# Altium PCB LY-LYJ-001V1.2.PcbDoc (part 1 of 2)
Units mm, origin at the board's own origin, x right, y up, seen from the top; angles counter-clockwise.
Board outline 190 x 47.13 mm, 2 copper layers (Top Layer, Bottom Layer); 162 components, 177 nets, 655 pads, 417 vias.
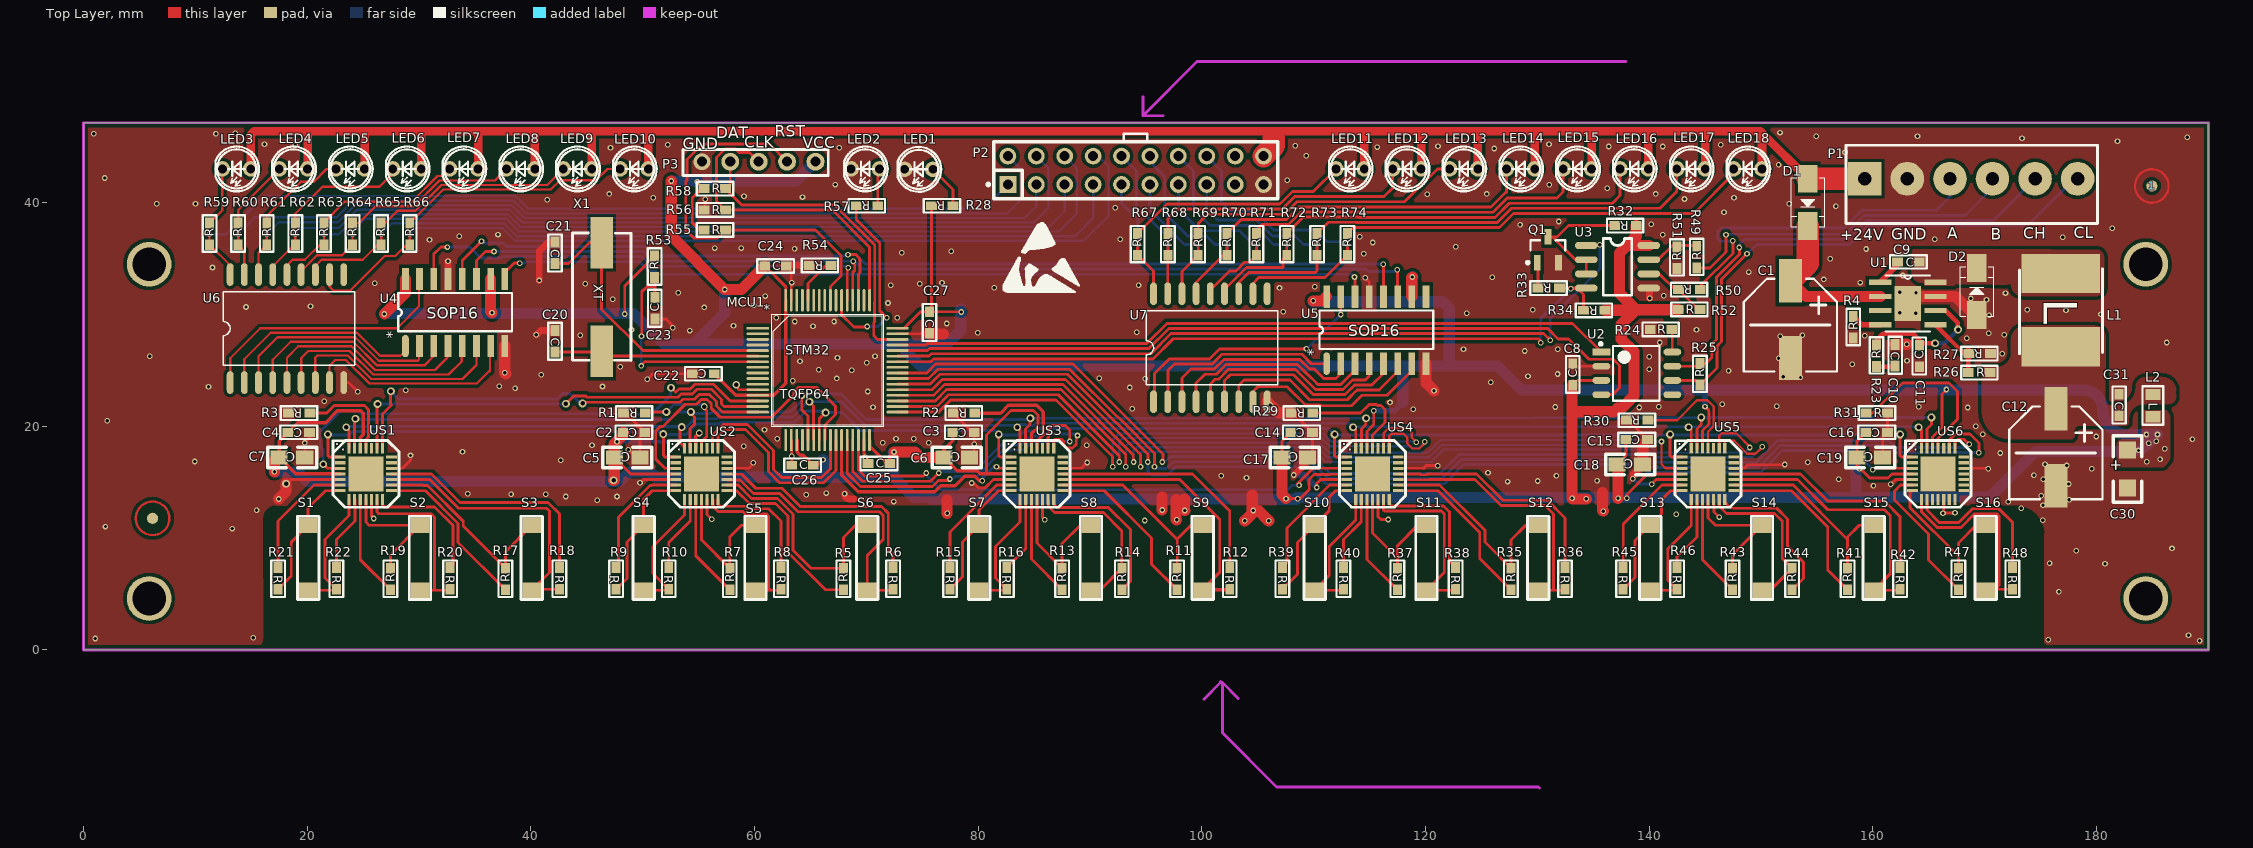
[diagram p0: Top Layer view]
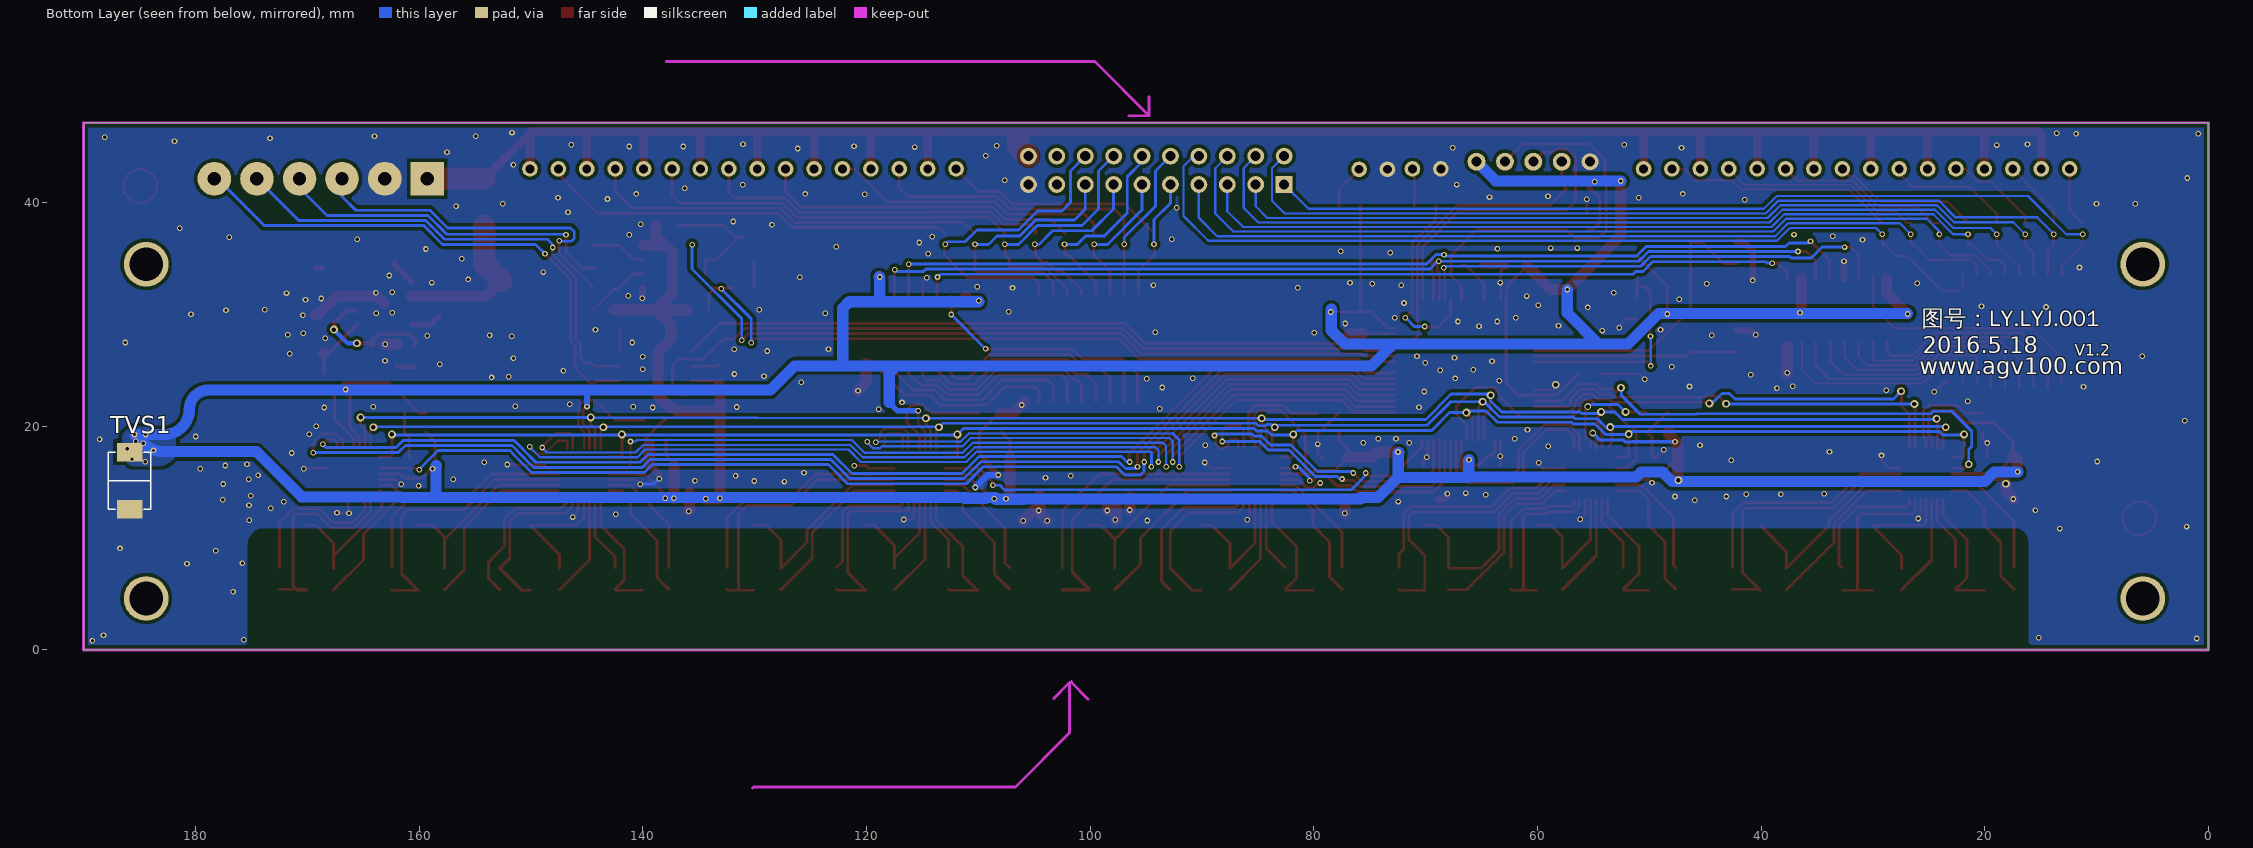
[diagram p1: Bottom Layer view, seen from below]

## Layer stack, top to bottom
Top Layer: signal copper 0.0356
Dielectric: dielectric 0.32, FR-4, Dk 4.8
Bottom Layer: signal copper 0.0356

## Board outline
0,47.129 0,0 190,0 190,47.129 0,47.129

## Design rules (kind name [scope] priority, off if disabled: settings)
Clearance Clearance_1 [inpoly] p1: gap=0.3
Clearance [All] p2: gap=0.203
PlaneClearance [All] p1: clearance=0.203
PlaneConnect [All] p1: planeconnectstyle=Direct reliefexpansion=0.508 reliefentries=4 reliefconductorwidth=0.5 reliefairgap=0.254
PolygonConnect VCC3_3 [InNet('VCC3.3V')] p1: connectstyle=Direct reliefconductorwidth=0.254 reliefentries=4 polygonreliefangle="90 Angle"
PolygonConnect NETC12_1 [InNet('NetC12_1')] p2: connectstyle=Direct reliefconductorwidth=0.254 reliefentries=4 polygonreliefangle="90 Angle"
PolygonConnect NETC9_1 [InNet('NetC9_1')] p3: connectstyle=Direct reliefconductorwidth=0.254 reliefentries=4 polygonreliefangle="90 Angle"
PolygonConnect [All] p4: connectstyle=Direct reliefconductorwidth=0.5 reliefentries=4 polygonreliefangle="90 Angle"
RoutingVias [All] p1: holewidth=0.4 width=0.7 viastyle="Through Hole" minholewidth=0.4 minwidth=0.6 maxholewidth=5 maxwidth=6
SilkscreenOverComponentPads [All] p1: minsilkscreentomaskgap=0.254
SolderMaskExpansion [All] p1: expansion=0.102
Width [All] p1: maxlimit=2.54 minlimit=0.203 preferedwidth=0.254
25 further rules are at their usual default settings.

## Components (designator, comment, footprint, x,y, rotation, side; value= is the part's Value field where it differs from the comment)
1 "Comment" Mark 184.937,41.478 r0 top
C1 "220uF" CAP_SMT_1 152.527,32.853 r180 top
C2 "104" C0603 50.127,19.391 r180 top
C3 "104" C0603 79.599,19.391 r180 top
C4 "104" C0603 20.163,19.391 r180 top
C5 "106" C0805 49.692,17.232 r180 top
C6 "106" C0805 79.163,17.232 r180 top
C7 "106" C0805 19.727,17.232 r180 top
C8 "104" C0603 133.096,23.709 r90 top
C9 "104" C0603 164.084,34.631 r180 top
C10 "4700pF" C0603 162.052,27.265 r270 top
C11 "47pF" C0603 164.084,25.36 r90 top
C12 "220uF" CAP_SMT_1 176.276,21.423 r180 top
C14 "104" C0603 109.825,19.391 r180 top
C15 "104" C0603 139.797,18.756 r180 top
C16 "104" C0603 161.26,19.391 r180 top
C17 "106" C0805 109.389,17.232 r180 top
C18 "106" C0805 139.361,16.597 r180 top
C19 "106" C0805 160.824,17.232 r180 top
C20 "12P" C0603 42.215,28.51 r270 top
C21 "12P" C0603 42.215,36.409 r270 top
C22 "104" C0603 56.337,24.624 r180 top
C23 "104" C0603 51.02,29.627 r90 top
C24 "104" C0603 60.96,34.377 r0 top
C25 "104" C0603 70.206,16.724 r0 top
C26 "104" C0603 63.373,16.572 r0 top
C27 "104" C0603 75.692,30.186 r270 top
C30 "10uF" C1206 182.753,17.882 r270 top
C31 "0.1uF" C0603 182.067,22.809 r270 top
D1 "D_SS14" D_3.0*5.0 154.178,42.124 r270 top
D2 "D_SS14" D_3.0*5.0 169.291,29.932 r90 top
L1 "5.5UH" L7*7 176.784,33.869 r270 top
L2 "L0805" L0805 185.166,21.819 r270 top
LED1 "" LED1-AK 74.625,42.977 r0 top
LED2 "" LED1-AK 69.85,43.013 r0 top
LED3 "" LED1-AK 13.631,43.013 r0 top
LED4 "" LED1-AK 18.711,43.013 r0 top
LED5 "" LED1-AK 23.791,43.013 r0 top
LED6 "" LED1-AK 28.871,43.013 r0 top
LED7 "" LED1-AK 33.951,43.013 r0 top
LED8 "" LED1-AK 39.031,43.013 r0 top
LED9 "" LED1-AK 44.111,43.013 r0 top
LED10 "" LED1-AK 49.191,43.013 r0 top
LED11 "" LED1-AK 113.199,43.013 r0 top
LED12 "" LED1-AK 118.279,43.013 r0 top
LED13 "" LED1-AK 123.359,43.013 r0 top
LED14 "" LED1-AK 128.439,43.013 r0 top
LED15 "" LED1-AK 133.519,43.013 r0 top
LED16 "" LED1-AK 138.599,43.013 r0 top
LED17 "" LED1-AK 143.679,43.013 r0 top
LED18 "" LED1-AK 148.759,43.013 r0 top
MCU1 "STM32F103R" TQFP64_STM32 60.325,28.789 r0 top
P1 "PIN6_6" KF350W_6 159.258,42.124 r0 top
P2 "Header 10X2" PIN20_10*2_2.54MM_1 82.677,41.489 r0 top
P3 "PIN5" PIN5_5*1_2.54MM_2 65.447,43.648 r180 top
Q1 "S8050" SOT-23 130.937,35.774 r90 top
R1 "33K" R0603 49.306,21.169 r180 top
R2 "33K" R0603 78.782,21.169 r180 top
R3 "33K" R0603 19.342,21.169 r180 top
R4 "243k" R0603 158.242,28.789 r90 top
R5 "100" R0603 67.945,6.283 r90 top
R6 "100" R0603 72.39,6.437 r270 top
R7 "100" R0603 57.785,6.283 r90 top
R8 "100" R0603 62.357,6.437 r270 top
R9 "100" R0603 47.625,6.437 r270 top
R10 "100" R0603 52.324,6.437 r270 top
R11 "100" R0603 97.79,6.283 r90 top
R12 "100" R0603 102.489,6.437 r270 top
R13 "100" R0603 87.503,6.283 r90 top
R14 "100" R0603 92.837,6.283 r90 top
R15 "100" R0603 77.47,6.437 r270 top
R16 "100" R0603 82.55,6.437 r270 top
R17 "100" R0603 37.719,6.283 r90 top
R18 "100" R0603 42.545,6.437 r270 top
R19 "100" R0603 27.432,6.283 r90 top
R20 "100" R0603 32.766,6.437 r270 top
R21 "100" R0603 17.399,6.437 r270 top
R22 "100" R0603 22.606,6.437 r270 top
R23 "16.9k" R0603 160.322,26.249 r90 top
R24 "0" R0603 141.097,28.662 r180 top
R25 "120" R0603 144.526,24.598 r90 top
R26 "31.6K" R0603 169.443,24.79 r0 top
R27 "10K" R0603 169.596,26.492 r180 top
R28 "5.1K" R0603 76.835,39.711 r180 top
R29 "33K" R0603 109.004,21.169 r180 top
R30 "33K" R0603 138.976,20.534 r180 top
R31 "33K" R0603 160.285,21.164 r0 top
R32 "10K" R0603 137.922,37.933 r180 top
R33 "10K" R0603 131.064,32.345 r180 top
R34 "10K" R0603 135.128,30.364 r180 top
R35 "100" R0603 127.635,6.283 r90 top
R36 "100" R0603 132.461,6.437 r270 top
R37 "100" R0603 117.475,6.283 r90 top
R38 "100" R0603 122.682,6.437 r270 top
R39 "100" R0603 107.188,6.437 r270 top
R40 "100" R0603 112.649,6.437 r270 top
R41 "100" R0603 157.734,6.283 r90 top
R42 "100" R0603 162.433,6.437 r270 top
R43 "100" R0603 147.447,6.283 r90 top
R44 "100" R0603 152.781,6.283 r90 top
R45 "100" R0603 137.668,6.437 r270 top
R46 "100" R0603 142.494,6.437 r270 top
R47 "100" R0603 167.64,6.283 r90 top
R48 "100" R0603 172.466,6.437 r270 top
R49 "10" R0603 144.247,35.063 r90 top
R50 "10" R0603 143.637,32.218 r180 top
R51 "1K" R0603 142.469,35.012 r90 top
R52 "1K" R0603 143.51,30.44 r0 top
R53 "10k" R0603 51.068,34.199 r90 top
R54 "10K" R0603 65.913,34.377 r180 top
R55 "10K" R0603 56.388,37.552 r0 top
R56 "10K" R0603 56.388,39.33 r0 top
R57 "5.1K" R0603 70.104,39.711 r180 top
R58 "10K" R0603 56.388,41.235 r0 top
R59 "5.1K" R0603 11.269,37.146 r90 top
R60 "5.1K" R0603 13.826,37.146 r90 top
R61 "5.1K" R0603 16.383,37.146 r90 top
R62 "5.1K" R0603 18.94,37.146 r90 top
R63 "5.1K" R0603 21.497,37.146 r90 top
R64 "5.1K" R0603 24.053,37.146 r90 top
R65 "5.1K" R0603 26.61,37.146 r90 top
R66 "5.1K" R0603 29.167,37.146 r90 top
R67 "5.1K" R0603 94.251,36.206 r90 top
R68 "5.1K" R0603 96.96,36.206 r90 top
R69 "5.1K" R0603 99.669,36.206 r90 top
R70 "5.1K" R0603 102.252,36.206 r90 top
R71 "5.1K" R0603 104.876,36.206 r90 top
R72 "5.1K" R0603 107.586,36.206 r90 top
R73 "5.1K" R0603 110.295,36.206 r90 top
R74 "5.1K" R0603 113.004,36.206 r90 top
S1 "PNI13104" PNI-13104 20.08,5.336 r90 top
S2 "PNI13104" PNI-13104 30.08,5.336 r90 top
S3 "PNI13104" PNI-13104 40.08,5.336 r90 top
S4 "PNI13104" PNI-13104 50.08,5.336 r90 top
S5 "PNI13104" PNI-13104 60.08,5.336 r90 top
S6 "PNI13104" PNI-13104 70.08,5.336 r90 top
S7 "PNI13104" PNI-13104 80.08,5.336 r90 top
S8 "PNI13104" PNI-13104 90.08,5.336 r90 top
S9 "PNI13104" PNI-13104 100.08,5.336 r90 top
S10 "PNI13104" PNI-13104 110.08,5.336 r90 top
S11 "PNI13104" PNI-13104 120.08,5.336 r90 top
S12 "PNI13104" PNI-13104 130.08,5.336 r90 top
S13 "PNI13104" PNI-13104 140.08,5.336 r90 top
S14 "PNI13104" PNI-13104 150.08,5.336 r90 top
S15 "PNI13104" PNI-13104 160.08,5.336 r90 top
S16 "PNI13104" PNI-13104 170.08,5.336 r90 top
TVS1 "SMBJ5.0CA" SMBJ6.5CA 185.852,12.751 r180 bottom
U1 "TPS54540" SOP8_1 163.195,30.948 r0 top
U2 "VP230" SOP8 138.938,24.725 r0 top
U3 "ISL3175" SO-8 137.16,34.25 r0 top
U4 "MC74HC595AD" SOP16 28.778,27.164 r90 top
U5 "MC74HC595AD" sop16 111.15,25.589 r90 top
U6 "ULN2803" SO-G18 13.106,23.902 r90 top
U7 "ULN2803" SO-G18 95.673,22.185 r90 top
US1 "PNI12927" MLF_28 23.029,17.232 r0 top
US2 "PNI12927" MLF_28 53.033,17.232 r0 top
US3 "PNI12927" MLF_28 83.036,17.232 r0 top
US4 "PNI12927" MLF_28 113.04,17.232 r0 top
US5 "PNI12927" MLF_28 143.044,17.232 r0 top
US6 "PNI12927" MLF_28 163.618,17.232 r0 top
X1 "8MHz" XTAL_49SMD 46.321,35.977 r270 top
? "Comment" Mark 6.172,11.76 r0 top

## Footprints (in the part's own frame and the unit in brackets; to place one, negate y for a bottom-side part, rotate by r counter-clockwise, add the part's x,y. Pads: shape width x height; smd on the part's side, far side on the other; paste and mask are expansions set on the pad)
C0603 [mm]
  rect 0.965x0.8 smd: 1(-0.051,-0.064) 2(1.875,-0.063)
  silkscreen extent -0.73,-0.66 2.57,0.54
C0805 [mil]
  rect 60x50 smd: 1(-2,1) 2(88,1)
  silkscreen extent -44,-35 129,37
C1206 [mil]
  rect 60x60 smd: 1(0,0) 2(135,0)
  silkscreen extent -50,-50 185,50
CAP_SMT_1 [mm]
  rect 2.05x3.9 smd: 1(-0.1,-0.141) 2(-0.1,6.759)
  silkscreen extent -4.25,-0.33 4.09,7.97
D_3.0*5.0 [mm]
  rect 2.5x1.75 smd: 1(0,0) 2(4.216,0)
  silkscreen extent -0.1,-1.5 4.3,1.5
KF350W_6 [mm]
  rect 3x3 hole 1.2: 1(0,0)
  round 3 hole 1.2: 2(3.81,0) 3(7.631,0) 4(11.43,0) 5(15.24,0) 6(19.05,0)
  silkscreen extent -1.67,-4 20.82,3
L7*7 [mm]
  rect 3.5x7 smd: 1(0.229,0) 2(6.771,0)
  silkscreen extent -0.21,-3.68 7.39,3.73
L0805 [mm]
  rect 1x1.35 smd: 1(-1.025,-0.127) 2(0.975,-0.127)
  silkscreen extent -1.75,-1.05 1.7,0.8
LED1-AK [mil]
  round 55 hole 31: A(52.06,-0.4) K(-47.94,-0.4)
  silkscreen extent -72,-79 81,79
Mark [mm]
  round 1 smd: 0(0,0)
  Top Layer circle w0.2: c0,0 r1.5
MLF_28 [mm]
  rect 3.14x3.14 smd: 0(2.21,-1.499)
  rect 0.95x0.28 smd: 1(-0.079,0) 2(-0.079,-0.5) 3(-0.079,-1) 4(-0.079,-1.5) 5(-0.079,-2) 6(-0.079,-2.5) 7(-0.081,-3) 15(4.506,-3) 16(4.503,-2.5) 17(4.504,-2) 18(4.504,-1.5) 19(4.504,-1) 20(4.504,-0.5) 21(4.506,0)
  rect 0.28x0.95 smd: 8(0.711,-3.79) 9(1.211,-3.787) 10(1.711,-3.787) 11(2.211,-3.787) 12(2.711,-3.787) 13(3.211,-3.787) 14(3.711,-3.79) 22(3.711,0.795) 23(3.211,0.792) 24(2.711,0.793) 25(2.211,0.793) 26(1.711,0.793) 27(1.211,0.793) 28(0.711,0.795)
  silkscreen extent -0.74,-4.48 5.16,1.5
PIN5_5*1_2.54MM_2 [mm]
  round 1.6 hole 0.9: 1(0,0) 2(2.54,0) 3(5.08,0) 4(7.62,0)
  round 1.524 hole 0.9: 5(10.16,0)
  silkscreen extent -1.14,-1.09 11.86,1.22
PIN20_10*2_2.54MM_1 [mm]
  rect 1.5x1.5 hole 0.9: 1(-0.025,0.122)
  round 1.5 hole 0.9: 2(-0.025,2.662) 3(2.515,0.122) 4(2.515,2.662) 5(5.055,0.122) 6(5.055,2.662) 7(7.595,0.122) 8(7.595,2.662) 9(10.135,0.122) 10(10.135,2.662) 11(12.675,0.122) 12(12.675,2.662) 13(15.215,0.122) 14(15.215,2.662) 15(17.755,0.122) 16(17.755,2.662) 17(20.295,0.122) 18(20.295,2.662) 19(22.835,0.122) 20(22.835,2.662)
  silkscreen extent -1.9,-1.15 24.1,4.66
PNI-13104 [mm]
  rect 1.4x1.7 smd: 1(0,0) 2(5.8,0)
  silkscreen extent -0.84,-0.96 6.62,0.96
R0603 [mm]
  rect 0.965x0.8 smd: 1(-0.914,0) 2(1.017,0)
  silkscreen extent -1.55,-0.61 1.7,0.61
SMBJ6.5CA [mil]
  rect 90x65 smd: 1(-1.3,-6.6) 2(-1.3,193.4)
  silkscreen extent -76,-7 74,193
SO-8 [mil]
  oval 80x24 smd: 1(-110,75) 2(-110,25) 3(-110,-25) 4(-110,-75) 5(110,-75) 6(110,-25) 7(110,25) 8(110,75)
  silkscreen extent -50,-100 50,100
SO-G18 [mil]
  oval 80x24 smd: 1(0,0) 2(0,-50) 3(0,-100) 4(0,-150) 5(0,-200) 6(0,-250) 7(0,-300) 8(0,-350) 9(0,-400) 10(380,-400) 11(380,-350) 12(380,-300) 13(380,-250) 14(380,-200) 15(380,-150) 16(380,-100) 17(380,-50) 18(380,0)
  silkscreen extent 60,-438 320,25
SOP8 [mm]
  rect 1.6x0.6 smd: 1(-3.224,1.905)
  oval 1.6x0.6 smd: 2(-3.224,0.635) 3(-3.224,-0.635) 4(-3.224,-1.905) 5(3.123,-1.905) 6(3.123,-0.635) 7(3.123,0.635) 8(3.123,1.905)
  silkscreen extent -3.4,-2.45 1.97,2.75
SOP8_1 [mil]
  rect 78x18.14 smd: 1(-100.1,75.9) 2(-100.1,25.9) 3(-100.1,-24.1) 4(-100.1,-74.1) 5(93.9,-74.1) 6(93.9,-24.1) 7(93.9,25.9) 8(93.9,75.9)
  rect 94x122 smd: 9(-3.1,0.9)
  silkscreen extent -82,-98 75,99
SOP16 [mm]
  oval 2x0.6 smd: 1(0,0)
  rect 2x0.6 smd: 2(0,-1.27) 3(0,-2.54) 4(0,-3.81) 5(0,-5.08) 6(0,-6.35) 7(0,-7.62) 8(0,-8.89) 9(6,-8.89) 10(6,-7.62) 11(6,-6.35) 12(6,-5.08) 13(6,-3.81) 14(6,-2.54) 15(6,-1.27) 16(6,0)
  silkscreen extent 1.32,-9.53 4.75,0.64
sop16 [mm]
  oval 2x0.6 smd: 1(0,0)
  rect 2x0.6 smd: 2(0,-1.27) 3(0,-2.54) 4(0,-3.81) 5(0,-5.08) 6(0,-6.35) 7(0,-7.62) 8(0,-8.89) 9(6,-8.89) 10(6,-7.62) 11(6,-6.35) 12(6,-5.08) 13(6,-3.81) 14(6,-2.54) 15(6,-1.27) 16(6,0)
  silkscreen extent 1.32,-9.53 4.75,0.64
SOT-23 [mm]
  rect 1.4x0.6 smd: 1(-1.15,0.95) 2(-1.15,-0.95) 3(1.15,0)
  silkscreen extent -1.27,-1.55 0.85,1.92, body extent -0.85,-1.55 0.85,1.55, height 1.1
TQFP64_STM32 [mm]
  rect 2x0.245 smd: 1(-0.043,-0.029)
  oval 2x0.245 smd: 2(-0.043,-0.529) 3(-0.043,-1.029) 4(-0.043,-1.529) 5(-0.043,-2.029) 6(-0.043,-2.529) 7(-0.043,-3.029) 8(-0.043,-3.529) 9(-0.043,-4.029) 10(-0.043,-4.529) 11(-0.043,-5.029) 12(-0.043,-5.529) 13(-0.043,-6.029) 14(-0.043,-6.529) 15(-0.043,-7.029) 16(-0.043,-7.529) 33(12.457,-7.529) 34(12.457,-7.029) 35(12.457,-6.529) 36(12.457,-6.029) 37(12.457,-5.529) 38(12.457,-5.029) 39(12.457,-4.529) 40(12.457,-4.029) 41(12.457,-3.529) 42(12.457,-3.029) 43(12.457,-2.529) 44(12.457,-2.029) 45(12.457,-1.529) 46(12.457,-1.029) 47(12.457,-0.529) 48(12.457,-0.029)
  oval 0.245x2 smd: 17(2.457,-10.029) 18(2.957,-10.029) 19(3.457,-10.029) 20(3.957,-10.029) 21(4.457,-10.029) 22(4.957,-10.029) 23(5.457,-10.029) 24(5.957,-10.029) 25(6.457,-10.029) 26(6.957,-10.029) 27(7.457,-10.029) 28(7.957,-10.029) 29(8.457,-10.029) 30(8.957,-10.029) 31(9.457,-10.029) 32(9.957,-10.029) 49(9.957,2.471) 50(9.457,2.471) 51(8.957,2.471) 52(8.457,2.471) 53(7.957,2.471) 54(7.457,2.471) 55(6.957,2.471) 56(6.457,2.471) 57(5.957,2.471) 58(5.457,2.471) 59(4.957,2.471) 60(4.457,2.471) 61(3.957,2.471) 62(3.457,2.471) 63(2.957,2.471) 64(2.457,2.471)
  silkscreen extent 1.21,-8.78 11.21,1.22
XTAL_49SMD [mm]
  rect 4.6x2 smd: 1(-0.432,0) 2(9.296,0)
  silkscreen extent -1.3,-2.6 10.1,2.62

## Part data
U4 U5: "8-Bit Serial-Input/S"

## Free pads (board coordinates)
  round 4 hole 3: 3(5.864,4.591) 3(5.864,34.478) 3(184.404,4.591) 3(184.404,34.478)

## Via types
v1: diameter 0.5, hole 0.3, Top Layer to Bottom Layer, 382 vias
v2: diameter 0.7, hole 0.4, Top Layer to Bottom Layer, 33 vias
v3: diameter 0.6, hole 0.4, Top Layer to Bottom Layer, 2 vias

## Nets (pads, with @x,y where several pads share a name; then routed paths per layer and width w, separated by ;. In a path a pad name is that pad's centre, name@x,y a point inside that pad or via, vN(x,y) a via of type N, cw(c..) or ccw(c..) an arc to the next point about the centre after c; other vN are vias at no path point)
CAN_RX: MCU1.44 U2.4 | length 70.6
  Top Layer w0.254: MCU1.44@72.782,26.76 75.457,26.76 75.632,26.935 95.25,26.935 97.053,28.738 130.919,28.738 131.851,27.806 132.783,27.806 134.599,25.99 136.758,25.99 137.338,25.411 137.338,23.43 136.728,22.82 U2.4@135.714,22.82
CAN_TX: MCU1.45 U2.1 | length 64.8
  Top Layer w0.254: MCU1.45@72.782,27.26 75.31,27.26 75.442,27.392 95.061,27.392 96.864,29.196 133.148,29.196 U2.1@135.714,26.63
CANH: P1.5 R25.2 U2.7 | length 43.9
  Top Layer w0.254: U2.7@142.061,25.36 144.271,25.36 R25.2@144.526,25.615 145.06,25.615 145.593,26.148 145.593,27.341 145.999,27.748 145.999,33.322 148.057,35.379 v1(148.057,35.977)
  Bottom Layer w0.254: v1(148.057,35.977) 148.057,36.253 148.514,36.71 157.716,36.71 159.397,38.39 170.764,38.39 P1.5@174.498,42.124
CANL: P1.6 R25.1 U2.6 | length 48.5
  Top Layer w0.254: U2.6@142.061,24.09 144.12,24.09 R25.1@144.526,23.684 146.05,25.208 146.05,27.152 146.456,27.558 146.456,33.133 v1(148.742,35.419)
  Bottom Layer w0.254: v1(148.742,35.419) 149.577,36.253 157.906,36.253 159.586,37.933 173.838,37.933 178.029,42.124 P1.6@178.308,42.124
CLEAR1: MCU1.16 US1.22 | length 40.3
  Top Layer w0.254: US1.22@26.74,18.028 26.74,21.087 27.534,21.88 27.457,21.957 v2@27.457,23.125 ; v2(44.628,22.033) 44.729,22.134 53.328,22.134 53.608,22.414 54.622,22.414 55.049,22.841 55.949,22.841 56.586,22.204 56.586,21.795 57.122,21.26 MCU1.16@60.282,21.26
  Bottom Layer w0.254: v2(27.483,23.125) 28.169,22.439 42.342,22.439 42.824,22.922 43.51,22.922 44.323,22.109 44.552,22.109 v2(44.628,22.033)
CLEAR2: MCU1.26 US2.22 | length 18
  Top Layer w0.254: US2.22@56.744,18.028 56.744,19.087 57.353,19.696 59.182,19.696 61.239,17.639 61.239,15.951 62.244,14.946 66.179,14.946 67.282,16.05 MCU1.26@67.282,18.76
CLEAR3: MCU1.29 US3.22 | length 29.3
  Top Layer w0.254: MCU1.29@68.782,18.76 68.782,15.938 69.647,15.073 75.717,15.073 v1(76.454,15.81) ; US3.22@86.748,18.028 86.748,18.712 86.868,18.832 87.452,18.832 87.609,18.676 87.609,18.389 87.948,18.049 88.429,18.049 88.769,18.389 88.769,19.057 v1(88.875,19.163)
  Bottom Layer w0.254: v1(76.454,15.81) 76.602,15.958 79.671,15.958 82.037,18.324 83.879,18.324 84.672,19.117 85.319,19.117 85.516,19.315 88.722,19.315 v1(88.875,19.163)
CLEAR4: MCU1.34 US4.22 | length 58.5
  Top Layer w0.203: US4.22@116.751,18.028 116.751,19.125 116.942,19.315 118.034,19.315 118.364,18.985 118.364,18.451 118.807,18.009 119.443,18.009 119.939,18.505 v1(119.939,18.604)
  Top Layer w0.254: MCU1.34@72.782,21.76 76.211,21.76 76.254,21.717 77.346,22.81 87.158,22.81 92.608,17.359 v1@92.608,16.851
  Bottom Layer w0.203: v1(92.608,16.8) 92.608,18.629 92.913,18.934 110.677,18.934 111.408,18.203 118.612,18.203 118.792,18.024 119.407,18.024 119.939,18.556 v1(119.939,18.604)
CLEAR5: MCU1.37 US5.22 | length 89.1
  Top Layer w0.203: US5.22@146.755,18.028 146.755,18.623 146.837,18.705 147.602,18.705 148.771,17.537 149.504,17.537 v1(150.114,18.147)
  Top Layer w0.254: MCU1.37@72.782,23.26 75.857,23.26 76.778,24.181 87.793,24.181 94.513,17.461 v1@94.513,16.394
  Bottom Layer w0.203: 94.564,17.689 94.59,17.715 110.155,17.715 111.065,16.804 120.502,16.804 121.604,17.907 139.797,17.907 140.471,17.232 149.2,17.232 v1(150.114,18.147)
  Bottom Layer w0.254: v1(94.513,16.369) 94.513,17.639 94.564,17.689
CLEAR6: MCU1.40 US6.22 | length 105.4
  Top Layer w0.254: MCU1.40@72.782,24.76 75.397,24.76 76.19,25.553 88.479,25.553 96.52,17.512 v1@96.52,16.8 ; US6.22@167.329,18.028 167.329,18.547 167.615,18.832 168.148,18.832 v1(168.605,18.375)
  Bottom Layer w0.254: v1(96.444,16.8) 96.698,16.8 97.18,17.283 109.943,17.283 111.452,15.773 121.302,15.773 123.003,17.475 139.535,17.475 140.235,16.775 149.563,16.775 150.694,17.906 150.694,17.937 151.488,18.731 161.417,18.731 162.052,18.096 168.351,18.096 v1@168.605,18.35
CLK_595: MCU1.52 U4.11 U5.11 | length 91.2
  Top Layer w0.254: U4.11@35.128,33.164 35.128,34.809 35.941,35.622 v1(36.703,35.622) ; MCU1.52@68.782,31.26 68.782,33.564 ; 68.783,33.564 68.783,33.76 68.957,33.934 68.957,34.414 68.758,34.614 68.758,34.707 v1(68.809,34.758) ; v1(117.475,33.996) 117.5,33.971 U5.11@117.5,31.589
  Bottom Layer w0.254: v1(36.703,35.622) 50.077,35.622 50.945,34.754 68.805,34.754 v1(68.809,34.758) 68.91,34.758 69.617,34.051 114.681,34.051 114.914,33.818 117.297,33.818 v1(117.475,33.996)
COMM: MCU1.54 R57.2 | length 17.3
  Top Layer w0.254: MCU1.54@67.782,31.26 67.782,29.968 68.885,28.865 70.028,28.865 v1(70.079,28.916) ; R57.2@69.087,39.711 69.087,38.491 71.197,36.381 71.197,30.881 71.192,30.877 71.192,30.317 v1(71.806,29.704)
  Bottom Layer w0.254: v1(70.079,28.916) 71.018,28.916 v1(71.806,29.704)
DI_595: MCU1.53 U4.14 | length 43.4
  Top Layer w0.254: U4.14@31.318,33.164 31.318,35.382 31.953,36.017 v1(32.537,36.017) ; MCU1.53@68.282,31.26 68.282,34.08 v1(68.377,34.174)
  Bottom Layer w0.254: v1(32.537,36.017) 34.544,36.017 35.52,35.042 37.317,35.042 37.44,35.165 49.888,35.165 50.755,34.297 68.254,34.297 v1(68.377,34.174)
DRDY1: MCU1.15 US1.23 | length 39.7
  Top Layer w0.254: US1.23@26.24,18.025 v2@26.24,22.109 ; v2(43.129,22.007) 43.835,22.713 44.91,22.713 45.031,22.592 53.139,22.592 53.418,22.871 54.432,22.871 54.859,23.298 56.139,23.298 57.044,22.393 57.044,21.985 57.268,21.76 MCU1.15@60.282,21.76
  Bottom Layer w0.254: v2(26.289,21.982) v2@43.231,21.982
DRDY2: MCU1.25 US2.23 | length 18.2
  Top Layer w0.254: US2.23@56.236,17.839 56.236,19.225 57.164,20.153 59.371,20.153 61.697,17.828 61.697,16.14 62.433,15.403 65.989,15.403 66.782,16.197 MCU1.25@66.782,18.76
DRDY3: MCU1.28 US3.23 | length 29.9
  Top Layer w0.254: MCU1.28@68.282,18.76 68.282,15.791 69.457,14.616 75.907,14.616 76.438,15.147 v1@77.47,15.147 ; US3.23@86.248,18.025 86.248,18.96 86.307,19.02 86.307,19.77 86.589,20.052 87.782,20.052 88.189,19.645 v1(88.189,18.629)
  Bottom Layer w0.254: v1(77.47,15.276) 77.673,15.276 77.898,15.501 79.86,15.501 82.226,17.867 84.069,17.867 84.831,18.629 v1(88.189,18.629)
DRDY4: MCU1.33 US4.23 | length 58.1
  Top Layer w0.203: US4.23@116.251,18.025 116.251,19.387 116.688,19.823 118.389,19.823 118.77,19.442 118.77,18.985 v1(119.177,18.578)
  Top Layer w0.254: MCU1.33@72.782,21.26 76.516,21.26 76.516,21.332 77.536,22.353 86.955,22.353 92.015,17.292 92.015,16.429 v1@92.024,16.419
  Bottom Layer w0.203: 92.608,19.34 110.795,19.34 110.82,19.366 111.577,18.609 112.133,18.609 112.153,18.629 v1@119.177,18.629
  Bottom Layer w0.254: v1(92.024,16.369) 92.024,18.756 92.608,19.34
DRDY5: MCU1.36 US5.23 | length 86.8
  Top Layer w0.203: US5.23@146.255,18.025 146.253,18.027 146.253,19.137 146.482,19.366 147.777,19.366 148.996,18.147 v1(148.996,18.096)
  Top Layer w0.254: MCU1.36@72.782,22.76 75.971,22.76 75.987,22.744 76.968,23.724 87.576,23.724 93.853,17.447 v1@93.853,16.8
  Bottom Layer w0.203: v1(93.887,16.8) 93.887,17.85 94.158,18.121 110.323,18.121 111.234,17.211 120.333,17.211 121.436,18.313 139.965,18.313 140.64,17.639 147.295,17.639 147.309,17.653 148.554,17.653 v1(148.996,18.096)
DRDY6: MCU1.39 US6.23 | length 109.2
  Top Layer w0.254: MCU1.39@72.782,24.26 75.564,24.26 76.4,25.096 88.172,25.096 92.46,20.807 92.5,20.807 92.767,20.539 92.781,20.539 95.758,17.562 v1(95.758,16.369) ; US6.23@166.829,18.025 166.829,18.758 167.361,19.29 168.681,19.29 169.469,18.502 v1(169.469,17.639)
  Bottom Layer w0.254: v1(95.758,16.369) 95.906,16.22 96.843,16.22 97.448,16.826 109.753,16.826 111.263,15.316 121.491,15.316 123.193,17.018 139.346,17.018 140.046,16.318 149.752,16.318 151.151,17.717 151.151,17.748 151.677,18.274 161.228,18.274 161.863,17.639 v1@169.52,17.639
GND: C1.2 C2.1 C3.1 C4.1 C5.1 C6.1 C7.1 C8.2 C10.1 C11.1 C12.2 C14.1 C15.1 C16.1 C17.1 C18.1 C19.1 C20.1 C21.1 C22.2 C23.1 C24.2 C25.1 C26.1 C27.2 C30.2 C31.1 D2.1 LED1.K LED2.K MCU1.12 MCU1.18 MCU1.31 MCU1.47 MCU1.63 P1.2 P2.19 P3.5 Q1.2 R1.2 R2.2 R3.2 R4.1 R24.2 R27.1 R29.2 R30.2 R31.2 R51.1 R54.2 R56.1 TVS1.1 U1.7 U1.9 U2.2 U3.5 U4.8 U4.13 U5.8 U5.13 U6.9 U7.9 US1.5 US1.12 US1.19 US2.5 US2.12 US2.19 US3.5 US3.12 US3.19 US4.5 US4.12 US4.19 US5.5 US5.12 US5.19 US6.5 US6.12 US6.19 | length 155.9
  Top Layer w0.254: v2(18.11,14.845) 18.498,15.232 US1.5@22.95,15.232 ; C7.1@19.778,17.207 19.778,18.493 v1(19.787,18.502) 20.214,18.929 C4.1@20.214,19.455 ; U6.9@23.266,23.902 23.698,23.902 v1(24.511,23.089) ; US1.12@25.74,13.445 25.74,11.939 v1(25.933,11.746) ; US1.19@27.533,16.232 28.515,16.232 29.235,16.953 v1(29.235,17.385) ; R1.2@48.29,21.169 48.464,21.169 C2.1@50.178,19.455 49.742,19.019 C5.1@49.742,17.207 49.392,17.207 v1(48.717,17.882) ; v1(49.759,14.946) 50.045,15.232 US2.5@52.954,15.232 ; v1(50.419,24.181) 50.925,24.687 C22.2@54.462,24.687 ; C23.1@51.083,29.577 52.07,29.577 52.68,28.967 v1(52.68,28.789) ; R56.1@55.575,39.102 v1(55.575,40.295) ; US2.12@55.744,13.445 55.744,12.11 v1(56.185,11.67) ; US2.19@57.537,16.232 59.496,16.232 59.868,16.604 v1(59.868,16.739) ; v2(58.369,23.709) 58.369,23.506 58.615,23.26 MCU1.12@60.282,23.26 ; C24.2@62.835,34.314 63.282,33.867 MCU1.63@63.282,31.26 ; MCU1.18@63.282,18.76 63.322,18.72 C26.1@63.322,16.508 ; MCU1.31@69.782,18.76 69.782,17.351 70.18,16.953 C25.1@70.18,16.407 ; MCU1.47@72.782,28.26 75.578,28.26 C27.2@75.629,28.311 ; R2.2@77.765,21.169 79.48,19.455 C3.1@79.65,19.455 79.65,17.643 C6.1@79.214,17.207 ; v1(79.426,14.921) 79.604,14.921 80.035,14.489 80.62,14.489 81.363,15.232 US3.5@82.958,15.232 ; US3.12@85.748,13.445 85.748,11.825 v1(85.954,11.619) ; US3.19@87.54,16.232 89.221,16.232 v1(89.738,16.75) ; R29.2@107.987,21.169 108.161,21.169 C14.1@109.876,19.455 109.876,17.643 C17.1@109.44,17.207 ; v1(110.261,14.514) 110.261,14.87 ; 110.261,14.895 110.261,14.87 ; US4.5@112.962,15.232 110.624,15.232 110.261,14.87 ; v1(114.605,33.26) 114.96,32.904 U5.13@114.96,31.589 ; US4.12@115.751,13.445 115.751,11.905 115.998,11.659 v1(116.662,11.659) ; US4.19@117.544,16.232 119.752,16.232 119.761,16.242 119.837,16.242 120.066,16.47 v1(121.082,16.47) ; C8.2@133.16,25.585 133.384,25.36 U2.2@135.714,25.36 ; R30.2@137.959,20.65 R30.2@137.959,20.534 138.133,20.534 C15.1@139.848,18.82 139.412,18.384 ; v1(138.532,15.302) 138.532,15.692 ; v1(140.208,14.819) 140.621,15.232 US5.5@142.965,15.232 ; US5.12@145.755,13.445 145.785,13.415 145.785,12.341 v1(146.253,11.873) ; US5.19@147.548,16.232 148.53,16.232 148.844,16.546 v1@152.121,16.546 ; C19.1@160.875,17.207 160.875,19.019 C16.1@161.311,19.455 161.311,21.155 R31.2@161.301,21.164 ; v1(161.595,14.819) 162.008,15.232 US6.5@163.539,15.232 ; US6.12@166.329,13.445 166.329,12.289 v1(166.268,12.228) 167.31,12.228 v1(167.335,12.254) ; US6.19@168.122,16.232 170.255,16.232 v1(170.307,16.18)
  Top Layer w0.508: v1(108.204,15.632) 109.44,16.868 C17.1@109.44,17.207
  Top Layer w0.6: U4.13@32.588,33.164 v1(32.588,34.747) ; v1(40.488,28.169) 40.88,28.561 C20.1@42.151,28.561 ; v1(40.742,33.031) 40.742,35.687 40.78,35.649 41.591,36.46 C21.1@42.151,36.46 ; C24.2@62.835,34.314 62.899,34.377 R54.2@64.896,34.377 ; v1(68.047,13.945) ccw(c68.509,13.945) 68.509,13.483 68.885,13.483 ; 138.532,15.692 C18.1@139.412,16.572 ; U3.5@139.954,32.345 cw(c139.954,32.269) 140.03,32.269 v1(140.03,31.431)
  Top Layer w1: v1(17.45,13.487) 18.11,14.148 v2(18.11,14.845) ; U4.8@37.668,27.164 v1(37.668,24.765) v1@37.744,24.689 ; C27.2@75.629,28.311 ccw(c75.695,28.311) 75.695,28.245 76.886,28.245 ; v1(77.216,12.217) 77.216,13.411 ; v1(96.444,12.508) 96.444,13.665 ; 97.688,13.437 97.688,11.67 v1(97.739,11.619) ; 98.45,13.462 98.45,12.482 v1(98.476,12.457) ; v1(103.835,11.543) 104.597,12.305 v1(104.597,12.457) ; 104.496,13.818 104.496,12.559 v1(104.597,12.457) ; U7.9@105.833,22.185 106.849,21.169 R29.2@107.987,21.169 ; v1(105.969,11.543) 105.054,12.457 v1(104.597,12.457) ; U5.8@120.04,25.589 120.04,23.887 v1(120.752,23.176) ; 135.814,14.072 135.814,12.482 v1(135.89,12.406) ; C18.1@139.412,16.572 139.412,18.384 ; C10.1@161.988,27.316 161.988,27.33 v1(163.017,27.33) ; U1.9@163.116,30.971 163.751,31.606 U1.7@165.58,31.606 167.389,31.606 169.062,29.932 D2.1@169.291,29.932
  Bottom Layer w0.254: v1(138.532,15.302) 139.014,14.819 v1(140.208,14.819)
  Bottom Layer w0.508: v1(108.204,15.632) 109.144,15.632 v1(110.261,14.514)
  other v1: 189.205,0.813 175.666,0.889 1.041,1.016 15.164,1.067 188.214,1.295 176.632,5.207 180.746,7.696 175.793,7.747 178.181,8.865 186.741,9.068 13.284,10.846 1.956,11.024 94.894,11.568 175.184,11.582 142.418,12.127 15.469,12.471 173.253,12.649 175.209,12.929 172.085,13.233 72.441,13.259 45.949,13.386 177.546,13.437 43.129,13.716 47.701,13.716 175.051,13.792 64.618,13.868 38.227,13.919 41.326,13.919 34.341,13.97 66.421,14.021 160.045,14.681 177.521,14.834 127.33,15.048 130.023,15.099 135.331,15.113 156.947,15.265 175.235,15.265 103.988,15.403 101.727,15.556 131.699,15.57 174.396,15.621 125.578,15.85 179.578,16.18 177.343,16.485 152.121,16.572 175.387,16.612 154.178,16.789 9.957,16.84 42.672,16.942 69.912,17.221 63.322,17.323 171.374,17.602 33.884,17.704 59.03,18.212 45.466,18.288 89.713,18.288 79.65,18.401 71.45,18.528 75.565,18.528 188.57,18.821 62.027,18.883 72.644,18.872 74.244,18.872 179.959,19.075 169.824,19.279 60.884,19.671 169.189,19.99 2.134,20.472 118.897,21.514 93.777,21.565 139.09,21.666 168.478,21.666 70.587,21.692 131.597,21.717 140.843,21.742 164.109,21.742 151.384,21.793 106.121,21.897 146.533,21.971 116.815,22.123 21.514,22.225 70.129,23.1 28.804,23.216 38.583,23.393 93.548,23.455 11.176,23.52 46.406,23.546 37.186,23.571 125.832,23.927 63.424,24.054 94.945,24.232 67.335,24.268 90.805,24.282 153.518,24.359 151.994,24.435 129.159,24.46 40.919,24.587 131.801,24.663 147.091,24.968 68.682,25.005 65.735,25.03 140.005,25.081 47.981,25.298 158.14,25.552 70.028,25.665 64.059,25.817 163.043,25.857 151.562,26.06 67.412,26.111 140.005,26.224 70.764,26.238 5.918,26.264 171.577,26.492 128.854,26.721 123.393,26.873 131.826,26.873 140.945,27.483 186.258,27.483 168.402,27.864 151.714,28.042 159.283,28.092 44.399,28.118 153.695,28.118 171.755,28.169 170.358,28.321 79.959,28.346 94.183,28.397 54.204,28.55 144.221,28.611 48.997,28.626 65.227,28.931 58.115,28.992 77.191,29.185 63.602,29.362 67.107,29.362 61.951,29.693 72.771,29.693 170.383,29.921 180.391,30.023 123.673,30.099 163.83,30.11 162.382,30.135 107.264,30.226 177.267,30.353 129.591,30.404 173.812,30.404 55.499,30.618 14.529,30.658 20.295,30.734 59.919,30.821 71.933,31.013 170.155,31.293 47.32,31.344 168.732,31.42 60.96,31.634 141.3,31.659 171.856,31.902 53.188,31.939 163.855,31.939 162.408,31.99 106.934,32.36 81.432,32.385 110.084,32.461 72.161,32.614 94.336,32.614 44.856,32.726 74.778,32.741 26.035,32.791 76.759,32.817 63.322,32.842 158.852,32.842 155.6,33.122 125.959,33.325 162.662,33.477 148.895,33.782 11.532,34.188 156.185,34.976 114.478,35.433 73.152,35.509 77.597,35.636 63.576,35.85 159.385,35.839 56.439,35.927 58.801,35.927 122.707,36.043 115.265,36.424 30.937,36.678 92.685,36.728 165.532,36.728 176.987,36.881 114.122,36.932 33.604,36.982 141.199,37.109 37.059,37.135 181.407,37.694 128.448,37.998 140.183,38.049 131.902,38.303 146.685,39.116 92.253,39.522 156.693,39.675 152.502,39.878 6.553,39.903 10.008,39.903 41.453,40.234 143.154,40.31 147.574,40.411 50.952,40.437 64.287,40.488 59.055,40.564 120.142,40.742 46.99,40.767 125.476,40.767 140.589,40.767 136.246,41.275 131.064,41.58 67.208,41.605 107.62,41.986 1.88,42.189 151.562,43.383 109.322,44.196 157.505,44.501 126.136,44.831 47.117,44.907 67.564,44.907 115.672,44.958 136.373,45.009 141.199,45.009 121.107,45.034 108.331,45.085 18.923,45.136 52.248,45.161 146.38,45.161 16.18,45.212 131.039,45.212 181.864,45.466 173.33,45.745 188.112,45.822 154.94,45.923 163.982,45.923 0.914,46.152 11.836,46.152 13.564,46.177 151.689,46.253
JNTRST: MCU1.56 P3.2 R55.2 | length 36.4
  Top Layer w0.254: P3.2@62.907,43.648 61.32,45.236 55.33,45.236 53.943,43.849 53.943,41.965 53.848,41.87 53.848,37.527 54.559,36.816 56.668,36.816 R55.2@57.405,37.552 65.456,37.552 67.742,35.266 67.742,33.437 66.782,32.478 MCU1.56@66.782,31.26
JTCK: MCU1.49 P3.3 R56.2 | length 28.6
  Top Layer w0.254: P3.3@60.367,43.648 59.547,44.468 58.605,44.468 58.295,44.778 57.359,44.778 56.592,44.012 56.592,40.143 R56.2@57.405,39.33 66.954,39.33 70.282,36.002 MCU1.49@70.282,31.26
JTMS: MCU1.46 P3.4 R58.2 | length 28.4
  Top Layer w0.254: P3.4@57.827,43.648 57.827,41.657 R58.2@57.405,41.235 58.853,39.787 67.144,39.787 70.74,36.192 70.74,31.071 70.735,31.066 70.735,29.305 70.651,29.221 70.651,29.165 70.659,29.157 70.659,28.676 70.651,28.668 70.651,28.116 71.006,27.76 MCU1.46@72.782,27.76
NetC1_1: C1.1 D1.2 U1.2 | length 14.2
  Top Layer w1: C1.1@152.627,32.994 154.015,31.606 U1.2@160.652,31.606
  Top Layer w2: C1.1@152.627,32.994 154.178,34.545 D1.2@154.178,37.908
NetC9_1: C9.1 D2.2 L1.1 U1.8 | length 0.6
  Top Layer w0.5: D2.2@168.681,34.149 D2.2@169.291,34.149
NetC9_2: C9.2 U1.1 | length 2.5
  Top Layer w0.5: U1.1@160.652,32.876 162.209,34.432 C9.2@162.209,34.695
NetC10_2: C10.2 R23.1 | length 1.7
  Top Layer w0.4: R23.1@160.322,25.335 161.933,25.335 C10.2@161.988,25.39
NetC11_2: C11.2 R23.2 U1.6 | length 12.3
  Top Layer w0.4: R23.2@160.322,27.266 160.322,27.694 160.884,28.256 163.601,28.256 164.147,27.71 C11.2@164.147,27.236 164.33,27.418 v2(165.557,27.418) ; U1.6@165.58,30.336 166.444,30.336 166.472,30.364 167.589,29.246 167.589,28.662 v2(167.615,28.637)
  Bottom Layer w0.4: v2(165.557,27.418) 166.395,27.418 v2(167.615,28.637)
NetC12_1: C12.1 C31.2 L1.2 L2.1 R26.2
NetLED1_A: LED1.A R28.1 | length 4
  Top Layer w0.254: LED1.A@75.948,42.967 77.749,41.165 R28.1@77.749,39.711
NetLED2_A: LED2.A R57.1 | length 3.4
  Top Layer w0.254: R57.1@71.018,39.711 71.018,42.849 LED2.A@71.172,43.003
NetLED3_K: LED3.K R59.2 | length 5.3
  Top Layer w0.203: R59.2@11.269,38.163 12.413,39.307 LED3.K@12.413,43.003
NetLED4_K: LED4.K R60.2 | length 6.4
  Top Layer w0.203: R60.2@13.826,38.163 13.826,39.335 LED4.K@17.493,43.003
NetLED5_K: LED5.K R61.2 | length 8.6
  Top Layer w0.203: R61.2@16.383,38.163 16.383,38.796 19.431,41.845 20.574,41.845 21.732,43.003 LED5.K@22.573,43.003
NetLED6_K: LED6.K R62.2 | length 11.4
  Top Layer w0.203: R62.2@18.94,38.163 18.94,38.991 21.361,41.413 26.467,41.413 27.653,42.6 LED6.K@27.653,43.003
NetLED7_K: LED7.K R63.2 | length 13.3
  Top Layer w0.203: R63.2@21.497,38.163 21.497,38.221 23.343,40.067 29.347,40.067 31.659,42.378 32.109,42.378 LED7.K@32.733,43.003
NetLED8_K: LED8.K R64.2 | length 15.8
  Top Layer w0.203: R64.2@24.053,38.163 24.613,38.163 26.111,39.66 29.516,39.66 31.827,41.972 36.782,41.972 LED8.K@37.813,43.003
NetLED9_K: LED9.K R65.2 | length 18.3
  Top Layer w0.203: R65.2@26.61,38.163 26.976,38.163 28.067,39.254 29.684,39.254 31.995,41.565 41.456,41.565 LED9.K@42.893,43.003
NetLED10_K: LED10.K R66.2 | length 20.8
  Top Layer w0.203: R66.2@29.167,38.163 32.164,41.159 41.783,41.159 42.624,42 45.849,42 46.852,43.003 LED10.K@47.973,43.003
NetLED11_K: LED11.K R67.2 | length 20.1
  Top Layer w0.254: R67.2@94.251,37.223 96.892,39.864 106.994,39.864 108.111,40.981 109.96,40.981 LED11.K@111.981,43.003
NetLED12_K: LED12.K R68.2 | length 24.3
  Top Layer w0.254: R68.2@96.96,37.223 96.96,38.551 97.816,39.407 107.184,39.407 108.3,40.524 116.281,40.524 117.061,41.304 LED12.K@117.061,43.003
NetLED13_K: LED13.K R69.2 | length 25.4
  Top Layer w0.254: R69.2@99.669,37.223 99.669,38.111 100.509,38.95 107.373,38.95 108.49,40.067 118.12,40.067 121.056,43.003 LED13.K@122.141,43.003
NetLED14_K: LED14.K R70.2 | length 28.6
  Top Layer w0.254: R70.2@102.252,37.223 103.521,38.493 107.562,38.493 108.679,39.61 114.386,39.61 114.411,39.584 125.836,39.584 127.106,40.854 127.152,40.854 127.221,40.923 LED14.K@127.221,43.003
NetLED15_K: LED15.K R71.2 | length 31.2
  Top Layer w0.254: R71.2@104.876,37.223 104.876,37.526 105.385,38.036 107.752,38.036 108.869,39.152 114.196,39.152 114.222,39.127 126.025,39.127 127.295,40.397 131.75,40.397 132.301,40.949 LED15.K@132.301,43.003
NetLED16_K: LED16.K R72.2 | length 33.6
  Top Layer w0.254: R72.2@107.586,37.223 109.058,38.695 114.007,38.695 114.032,38.67 126.215,38.67 127.485,39.94 136.703,39.94 137.381,40.618 LED16.K@137.381,43.003
NetLED17_K: LED17.K R73.2 | length 35.8
  Top Layer w0.254: R73.2@110.295,37.223 111.31,38.238 113.817,38.238 113.843,38.213 126.404,38.213 127.674,39.483 140.97,39.483 142.461,40.974 LED17.K@142.461,43.003
NetLED18_K: LED18.K R74.2 | length 37.2
  Top Layer w0.254: R74.2@113.004,37.223 113.537,37.755 126.594,37.755 127.864,39.025 143.993,39.025 147.541,42.574 LED18.K@147.541,43.003
NetMCU1_60: MCU1.60 R54.1 | length 4.2
  Top Layer w0.254: MCU1.60@64.782,31.26 64.782,32.764 66.396,34.377 R54.1@66.827,34.377
NetQ1_1: Q1.1 R33.2 | length 2.3
  Top Layer w0.254: Q1.1@129.987,34.624 130.047,34.564 R33.2@130.047,32.345
NetQ1_3: Q1.3 R32.2 U3.2 U3.3 | length 11.5
  Top Layer w0.254: Q1.3@130.937,36.924 131.362,36.924 ; U3.3@134.366,33.615 U3.2@134.366,34.885 133.401,34.885 131.362,36.924 ; R32.2@136.905,37.933 132.766,37.933 131.757,36.924 131.362,36.924
NetR1_1: R1.1 US2.25 | length 9.8
  Top Layer w0.254: R1.1@50.221,21.169 50.322,21.271 v2(52.121,21.271) ; US2.25@55.244,18.025 55.244,18.607 55.728,19.091 55.728,21.387 ; v3@55.575,21.677 v3(55.499,21.753) 55.499,21.589 55.715,21.374
  Bottom Layer w0.254: v2(52.121,21.271) 52.801,21.951 55.301,21.951 v3(55.499,21.753)
NetR2_1: R2.1 US3.25 | length 10.2
  Top Layer w0.3: R2.1@79.696,21.169 81.991,21.169 82.694,21.872 85.225,21.872 85.827,21.271 85.827,19.218 85.255,18.646 85.255,18.032 US3.25@85.248,18.025
NetR3_1: R3.1 US1.25 | length 9.2
  Top Layer w0.254: R3.1@20.256,21.169 21.742,21.169 22.418,21.845 25.117,21.845 25.491,21.471 25.491,19.057 25.24,18.806 US1.25@25.24,18.025
NetR4_2: R4.2 U1.4 | length 2.7
  Top Layer w0.5: R4.2@158.242,29.806 158.982,29.066 U1.4@160.652,29.066
NetR5_1: R5.1 US2.15 | length 16
  Top Layer w0.254: US2.15@57.539,14.232 57.743,14.232 57.752,14.224 58.396,14.224 59.539,13.081 61.872,13.081 62.992,11.961 62.992,8.712 66.335,5.368 R5.1@67.945,5.368
NetR5_2: R5.2 S6.2 US2.16 | length 20.7
  Top Layer w0.254: US2.16@57.536,14.732 58.535,14.732 59.729,13.538 62.061,13.538 63.449,12.15 63.449,8.901 65.05,7.3 R5.2@67.945,7.3 67.945,10.044 69.037,11.136 S6.2@70.08,11.136
NetR6_1: R6.1 US2.18 | length 20.9
  Top Layer w0.254: US2.18@57.537,15.732 57.566,15.702 58.858,15.702 60.108,14.452 62.44,14.452 64.08,12.813 71.36,12.813 71.958,12.215 71.958,9.028 72.39,8.596 R6.1@72.39,7.352
NetR6_2: R6.2 S6.1 US2.17 | length 24.9
  Top Layer w0.254: US2.17@57.537,15.232 57.566,15.202 58.711,15.202 59.918,13.995 62.251,13.995 63.89,12.355 71.171,12.355 71.501,12.025 71.501,9.866 70.08,8.445 S6.1@70.08,5.336 72.306,5.336 R6.2@72.39,5.42
NetR7_1: R7.1 US2.10 | length 9.3
  Top Layer w0.254: US2.10@54.744,13.445 54.744,8.41 R7.1@57.785,5.368
NetR7_2: R7.2 S5.2 US2.11 | length 12.7
  Top Layer w0.254: US2.11@55.244,13.445 55.244,9.841 R7.2@57.785,7.3 57.785,10.095 58.826,11.136 S5.2@60.08,11.136
NetR8_1: R8.1 US2.14 | length 10.8
  Top Layer w0.254: US2.14@56.744,13.443 56.744,13.007 56.913,12.838 59.136,12.838 59.35,12.624 61.256,12.624 62.357,11.523 R8.1@62.357,7.352
NetR8_2: R8.2 S5.1 US2.13 | length 15
  Top Layer w0.254: US2.13@56.244,13.445 56.274,13.415 56.274,12.831 56.735,12.37 58.957,12.37 59.161,12.166 61.067,12.166 61.26,11.973 61.26,5.544 61.468,5.336 ; S5.1@60.08,5.336 61.468,5.336 ; R8.2@62.357,5.42 62.273,5.336 61.468,5.336
NetR9_1: R9.1 US2.6 | length 10.9
  Top Layer w0.254: R9.1@47.625,7.352 47.828,7.555 47.828,11.859 50.659,14.689 50.797,14.689 50.84,14.732 US2.6@52.954,14.732
NetR9_2: R9.2 S4.2 US2.7 | length 12.3
  Top Layer w0.254: R9.2@47.625,5.42 48.59,6.386 48.59,9.646 S4.2@50.08,11.136 50.08,13.464 50.848,14.232 US2.7@52.951,14.232
NetR10_1: R10.1 US2.9 | length 6.9
  Top Layer w0.254: R10.1@52.324,7.352 52.324,9.612 54.244,11.532 US2.9@54.244,13.445
NetR10_2: R10.2 S4.1 US2.8 | length 12
  Top Layer w0.254: S4.1@50.08,5.336 52.24,5.336 R10.2@52.324,5.42 50.927,6.817 50.927,9.231 53.744,12.048 US2.8@53.744,13.443
NetR11_1: R11.1 US3.15 | length 15.3
  Top Layer w0.254: US3.15@87.543,14.232 91.265,14.232 95.504,9.993 95.504,7.654 R11.1@97.79,5.368
NetR11_2: R11.2 S9.2 US3.16 | length 20.2
  Top Layer w0.254: US3.16@87.54,14.732 92.924,14.732 97.79,9.866 R11.2@97.79,7.3 97.79,9.917 99.009,11.136 S9.2@100.08,11.136
NetR12_1: R12.1 US3.18 | length 21.4
  Top Layer w0.254: US3.18@87.54,15.732 99.163,15.732 102.489,12.406 R12.1@102.489,7.352
NetR12_2: R12.2 S9.1 US3.17 | length 27.3
  Top Layer w0.254: US3.17@87.54,15.232 98.012,15.232 101.6,11.644 101.6,6.944 100.077,5.42 R12.2@102.489,5.42 102.405,5.336 S9.1@100.08,5.336
NetR13_1: R13.1 US3.10 | length 9.2
  Top Layer w0.254: US3.10@84.748,13.445 84.748,8.124 R13.1@87.503,5.368
NetR13_2: R13.2 S8.2 US3.11 | length 12.5
  Top Layer w0.254: US3.11@85.248,13.445 85.248,9.555 R13.2@87.503,7.3 87.503,9.511 89.129,11.136 S8.2@90.08,11.136
NetR14_1: R14.1 US3.14 | length 13.9
  Top Layer w0.254: US3.14@86.748,13.443 86.748,13.035 87.046,12.736 91.618,12.736 93.599,10.755 93.599,6.13 R14.1@92.837,5.368
NetR14_2: R14.2 S8.1 US3.13 | length 15
  Top Layer w0.254: US3.13@86.248,13.445 86.277,13.415 86.277,12.831 86.829,12.279 91.186,12.279 92.837,10.628 R14.2@92.837,7.3 90.873,5.336 S8.1@90.08,5.336
NetR15_1: R15.1 US3.6 | length 10.4
  Top Layer w0.254: R15.1@77.47,7.352 77.47,10.543 81.659,14.732 US3.6@82.958,14.732
NetR15_2: R15.2 S7.2 US3.7 | length 11.7
  Top Layer w0.254: R15.2@77.47,5.42 78.588,6.538 78.588,9.644 S7.2@80.08,11.136 80.08,12.49 81.822,14.232 US3.7@82.955,14.232
NetR16_1: R16.1 US3.9 | length 6.8
  Top Layer w0.254: R16.1@82.55,7.352 84.248,9.049 US3.9@84.248,13.445
NetR16_2: R16.2 S7.1 US3.8 | length 11.9
  Top Layer w0.254: S7.1@80.08,5.336 82.466,5.336 R16.2@82.55,5.42 81.533,6.437 81.533,9.232 83.748,11.447 US3.8@83.748,13.443
NetR17_1: R17.1 US1.15 | length 14.9
  Top Layer w0.254: US1.15@27.535,14.232 30.571,14.232 33.496,11.307 33.496,9.591 R17.1@37.719,5.368